# Altium PCB PCB2.PcbDoc
Units mm, origin at the board's own origin, x right, y up, seen from the top; angles counter-clockwise.
Board outline 120 x 60 mm, 2 copper layers (Top Layer, Bottom Layer); 14 components, 14 nets, 72 pads, 22 vias.
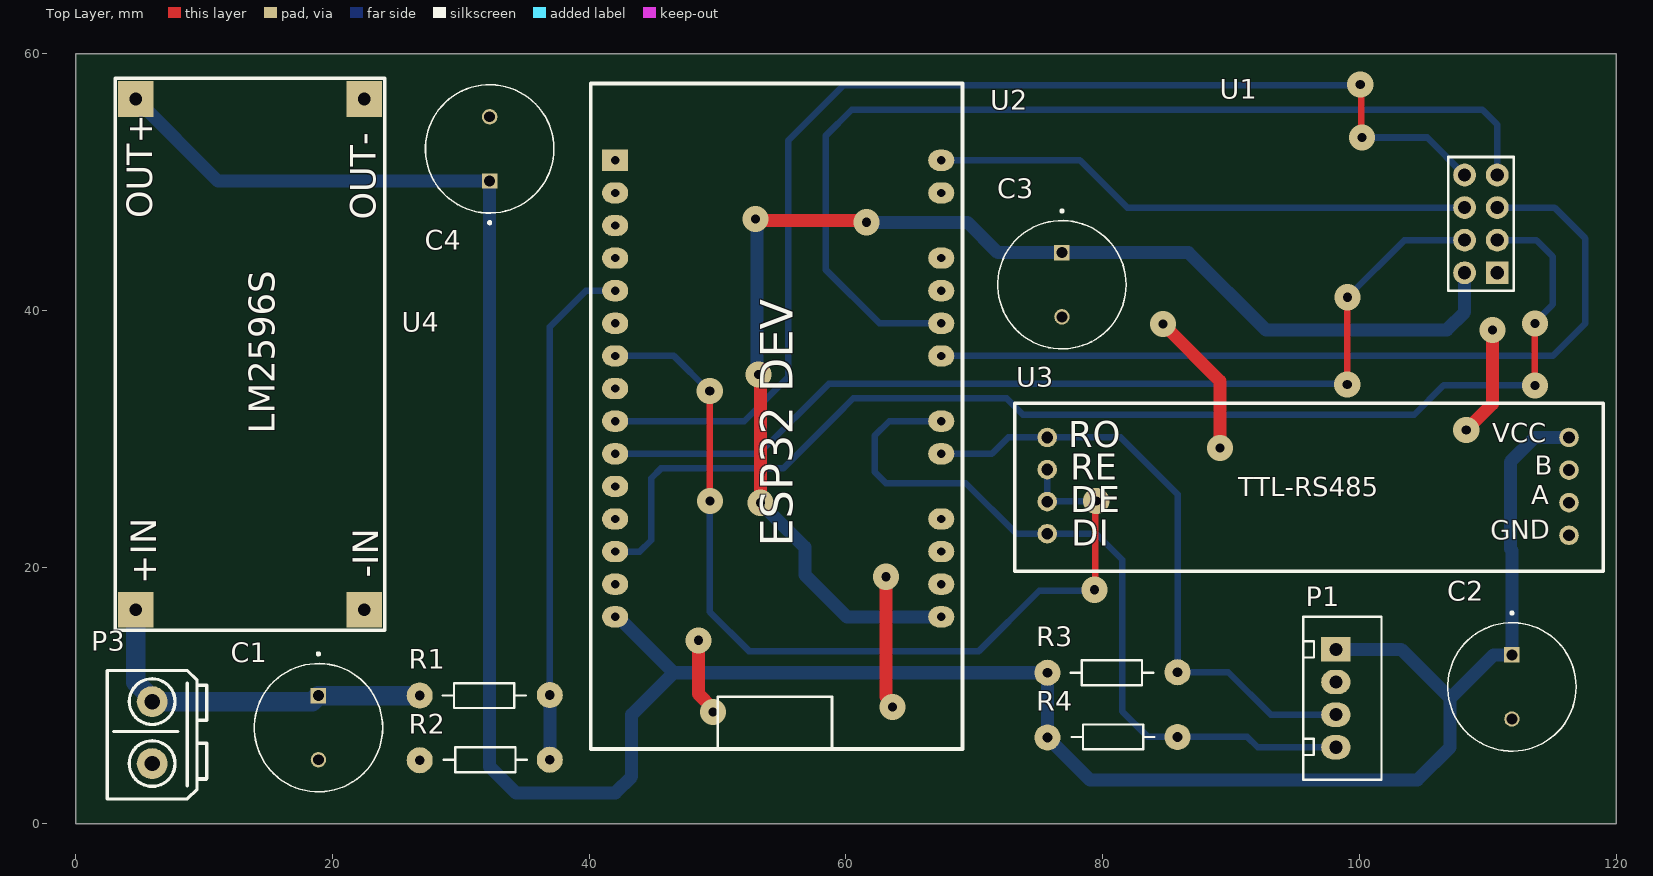
[diagram p0: Top Layer view]
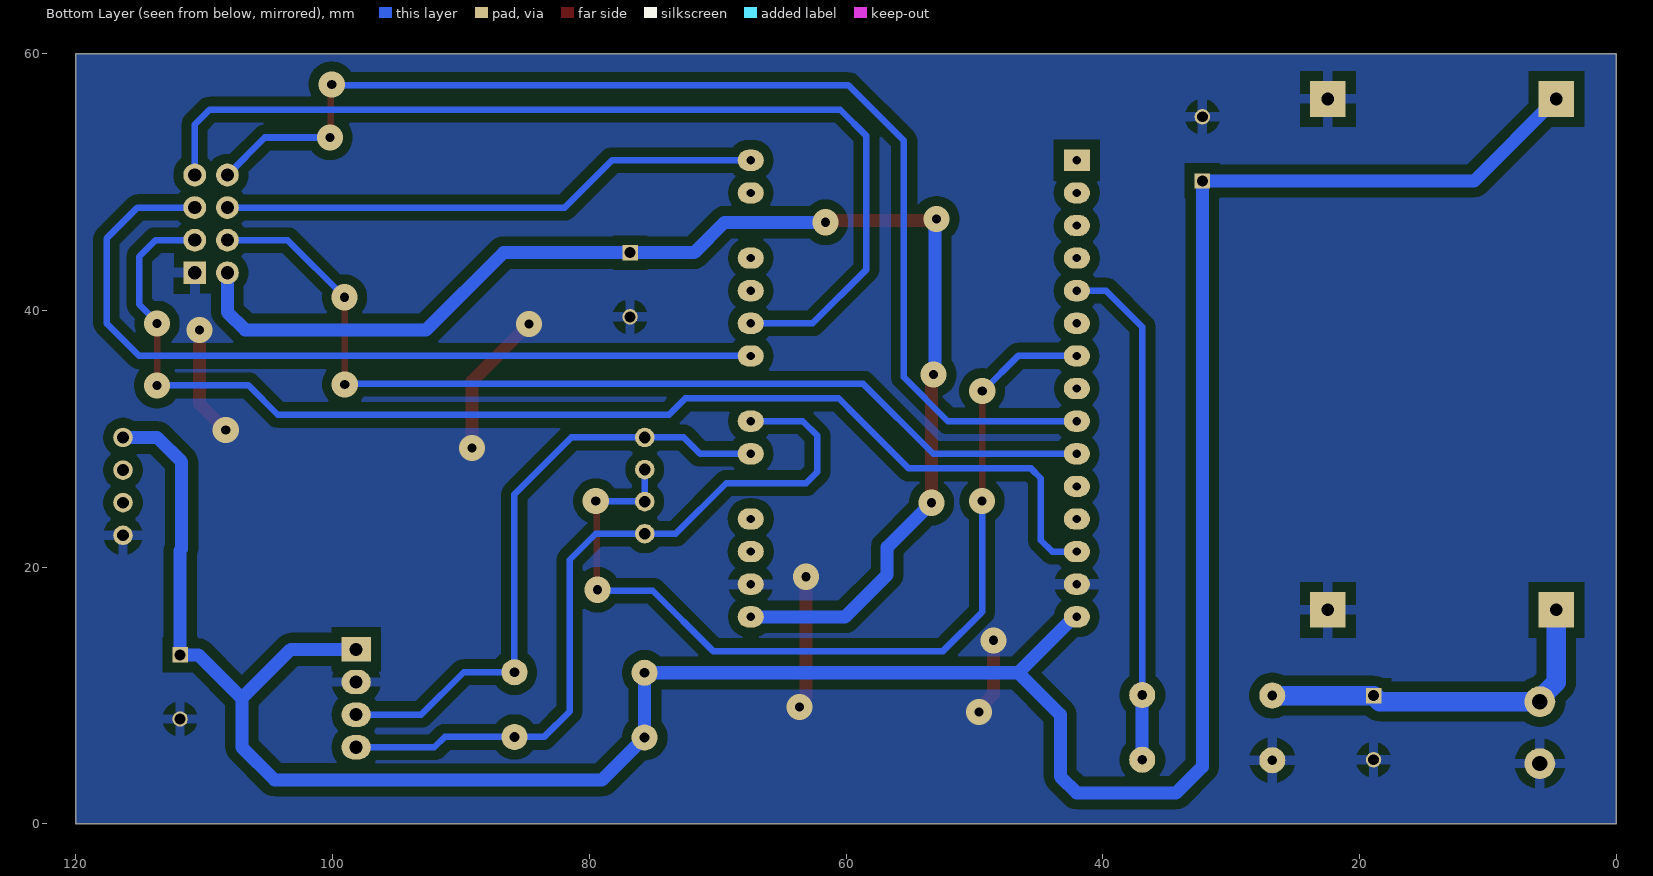
[diagram p1: Bottom Layer view, seen from below]

## Layer stack, top to bottom
Top Solder: solder mask 0.0102, Solder Resist, Dk 3.5
Top Layer: signal copper 0.0356
Dielectric 1: dielectric 0.32, FR-4, Dk 4.8
Bottom Layer: signal copper 0.0356
Bottom Solder: solder mask 0.0102, Solder Resist, Dk 3.5

## Board outline
0,0 0,60 120,60 120,0

## Design rules (kind name [scope] priority, off if disabled: settings)
Clearance [All] p1: gap=0.254 ignorepadtopadclearanceinfootprint=FALSE except(0: Arc-Hole Track-Hole SMDPad-Hole THPad-Hole Via-Hole Fill-Hole Poly-Hole Region-Hole Text-Hole; 0.762: Arc-Fill Arc-Poly Arc-Region Track-Fill Track-Poly Track-Region SMDPad-Fill SMDPad-Poly SMDPad-Region THPad-Fill THPad-Poly THPad-Region Via-Fill Via-Poly Via-Region Fill-Fill Fill-Poly Fill-Region Poly-Poly Poly-Region Region-Region)
PlaneClearance [All] p1: clearance=0.762
PlaneConnect [All] p1: planeconnectstyle=Relief reliefexpansion=0.762 reliefentries=4 reliefconductorwidth=0.762 reliefairgap=0.762
PolygonConnect [All] p1: connectstyle=Relief reliefconductorwidth=0.762 reliefentries=4 polygonreliefangle="90 Angle" airgapwidth=0.762
RoutingVias [All] p1: holewidth=0.711 width=1.27 viastyle="Through Hole" minholewidth=0.711 minwidth=1.27 maxholewidth=0.711 maxwidth=1.27
SolderMaskExpansion [All] p1: expansion=0.102 istentingtop=FALSE
Width [All] p1: maxlimit=1.524 minlimit=0.508 preferedwidth=1.016 minimp=50.000000 maximp=50.000000 favimp=50.000000
28 further rules are at their usual default settings.

## Classes and differential pairs
component class Schematic: C1 C2 C3 C4 P1 P3 R1 R2 U1 U2 U3 U4

## Components (designator, comment, footprint, x,y, rotation, side; value= is the part's Value field where it differs from the comment)
C1 "220uF/25V" CAP-ALUM-10x12.5 18.914,7.496 r270 top
C2 "220uF/25V" CAP-ALUM-10x12.5 111.878,10.671 r270 top
C3 "220uF/25V" CAP-ALUM-10x12.5 76.826,42 r270 top
C4 "220uF/25V" CAP-ALUM-10x12.5 32.249,52.581 r90 top
P1 "GPS" B4B-XH-A 98.162,13.592 r270 top value=B4B-XH-A
P3 "Domino 2" Domino-2 5.96,7.115 r0 top
R1 "100K" R1/4W-H1 31.868,10.015 r180 top
R2 "47K" R1/4W-H1 31.868,4.977 r0 top
R3 "100K" R1/4W-H1 80.763,11.793 r180 top (schematic designator R1)
R4 "47K" R1/4W-H1 80.763,6.755 r0 top (schematic designator R2)
U1 "Lora_SX1278" Module-LORA-SX1278 110.735,42.929 r90 top
U2 "ESP32_30P" Kit-ESP32-30P 55.49,28.578 r0 top
U3 "Uart_to_RS485_V1" Module-Uart-RS485-V1 96.003,26.292 r0 top
U4 "LM2596S" Module-LM2596S 13.58,36.579 r90 top

## Footprints (in the part's own frame and the unit in brackets; to place one, negate y for a bottom-side part, rotate by r counter-clockwise, add the part's x,y. Pads: shape width x height; smd on the part's side, far side on the other; paste and mask are expansions set on the pad)
B4B-XH-A [mil] "B4B-XH-A"
  rect 75x90 hole 40: 1(0,0)
  oval 75x90 hole 40: 2(100,0) 3(200,0) 4(300,0)
  silkscreen extent -100,-100 400,140, body extent -94,-93 394,133, height 271
CAP-ALUM-10x12.5 [mm] "Capacitor Aluminum 10mmx12.5mm"
  rect 1.2x1.2 hole 0.85: 1(-2.5,0)
  round 1.2 hole 0.85: 2(2.5,0)
  silkscreen extent -5.85,-5 5,5, body extent -5,-5 5,5, height 12.5
Domino-2 [mil] "Domino-2"
  round 94.5 hole 47.2 paste-99999 mask+2: 1(0,-95) 2(0,95)
  silkscreen extent -138,-203 168,190, body extent -197,-195 197,221, height 551
Kit-ESP32-30P [mil] "Kit ESP32 30P"
  rect 80x65 hole 25.2: 1(-530,910)
  oval 80x65 hole 25.2: 2(-530,810) 3(-530,710) 4(-530,610) 5(-530,510) 6(-530,410) 7(-530,310) 8(-530,210) 9(-530,110) 10(-530,10) 11(-530,-90) 12(-530,-190) 13(-530,-290) 14(-530,-390) 15(-530,-490) 16(470,-490) 17(470,-390) 18(470,-290) 19(470,-190) 21(470,10) 22(470,110) 24(470,310) 25(470,410) 26(470,510) 27(470,610) 29(470,810) 30(470,910)
  round 0 all layers, no hole: 20(-2184.66,-90) 23(-2184.66,210) 28(-2184.66,710)
  silkscreen extent -605,-895 535,1145, body extent -596,-880 526,1125, height 473
Module-LM2596S [mm] "Module LM2596S"
  rect 2.799x2.799 hole 1 paste-2539.97 mask+0.102: 1(-19.9,8.9) 2(-19.9,-8.9) 3(19.9,8.9) 4(19.9,-8.9)
  silkscreen extent -21.5,-10.5 21.5,10.5, body extent -21.6,-10.63 21.6,10.63, height 13.35
Module-LORA-SX1278 [mil] "Module Lora SX1278 RA-02 SPI"
  rect 70x70 hole 40.16: 1(0,0)
  round 70 hole 40.16: 2(100,0) 3(200,0) 4(300,0) 5(0,100) 6(100,100) 7(200,100) 8(300,100)
  silkscreen extent -55,-50 355,150, body extent -204,-50 504,861, height 497
Module-Uart-RS485-V1 [mil] "Module Uart to RS485 V1"
  round 60 hole 36 paste+0 mask+2: 1(-800,150) 2(-800,51.57) 3(-800,-46.85) 4(-800,-145.28) 5(800,-150) 6(800,-50) 7(800,50) 8(800,150)
  silkscreen extent -900,-260 905,255, body extent -866,-276 866,276, height 743
R1/4W-H1 [mil] "R 1/4W Horizontal, 2 Pin, 350mil"
  round 80 hole 30: 1(-199.5,-0.75) 2(199.5,0.75)
  silkscreen extent -126,-37 128,39, body extent -211,-51 211,51, height 106

## Part data
C1 C2 C3 C4: library part EEUTA1E221, "Capacitor Aluminum 220uF 20% 25V Radial", MPN=CLA4514, Category=CAPACITOR, MFR_URL=http://linhkienchatluong.vn/tu-hoa-chat-luong-cao/tu-hoa-63v-47uf-nipponlelon-8x11mm_sp977_ct6500.aspx, PinCount=2, Solder=WAVE
P1: library part B4B-XH-A, "Connector Header Through Hole 4 position 0.098\" (2.50mm)"
P3: library part Domino-2
R1 R2 R3 R4: library part RES-1/4W, "Resistor 1/4W Through Hole"
U1: library part Module-Lora-SX1278-SPI, "Module Lora SX1278 RA02 SPI"
U2: library part Kit_ESP32_30P, "Kit ESP32 30P"
U3: library part Module-Uart-to-RS485-V1, "Module Uart to RS485 V1"
U4: library part Module-LM2596S, "Module LM2596S"

## Via types
v1: diameter 2.032, hole 0.711, Top Layer to Bottom Layer, 22 vias

## Nets (pads, with @x,y where several pads share a name; then routed paths per layer and width w, separated by ;. In a path a pad name is that pad's centre, name@x,y a point inside that pad or via, vN(x,y) a via of type N, cw(c..) or ccw(c..) an arc to the next point about the centre after c; other vN are vias at no path point)
ADC: R1.1 R2.2 U2.5 | length 40
  Bottom Layer w0.508: R1.1 36.936,38.714 39.754,41.532 U2.5
  Bottom Layer w1.016: R2.2 R1.1
CT: U2.7 U3.2 U3.3 | length 72.4
  Top Layer w0.508: v1(49.394,33.732) 49.398,33.727 49.398,25.151 v1(49.403,25.146) ; v1(79.366,18.238) 79.434,18.306 79.434,25.078 v1(79.502,25.146)
  Bottom Layer w0.508: U2.7 46.606,36.452 v1@49.276,33.782 ; v1(49.403,25.146) 49.403,16.51 52.451,13.462 70.358,13.462 75.057,18.161 v1@79.756,18.161 ; U3.2 U3.3 75.705,25.124 79.48,25.124 v1(79.502,25.146)
DC3V3: C3.1 U1.5 U2.16 | length 103.5
  Top Layer w1.016: v1(52.959,47.117) 53.086,46.99 61.468,46.99 v1(61.595,46.863) ; v1(53.34,25.019) v1@53.34,34.798
  Bottom Layer w1.016: v1(52.959,47.117) 53.081,46.995 53.081,35.124 v1(53.204,35.002) ; v1(53.34,25.019) 56.801,21.558 56.801,19.399 60.068,16.132 U2.16 ; v1(61.595,46.863) 69.469,46.863 71.832,44.5 C3.1 86.691,44.5 92.71,38.481 106.807,38.481 108.195,39.869 U1.5
DC5V: C2.1 C4.1 P1.1 R3.2 R4.1 U2.15 U3.8 U4.3 | length 213
  Bottom Layer w1.016: U4.3 11.078,50.081 C4.1 32.249,4.454 34.29,2.413 42.037,2.413 43.307,3.683 43.307,8.504 46.577,11.774 ; U2.15 42.219,16.132 46.577,11.774 ; P1.1 103.248,13.592 107.061,9.779 ; U3.8 113.668,30.102 111.763,28.197 111.763,21.397 111.878,21.281 C2.1 110.453,13.171 107.061,9.779 ; 46.577,11.774 R3.2 R4.1 79.003,3.429 104.521,3.429 107.061,5.969 107.061,9.779
GND: C1.2 C2.2 C3.2 C4.2 P1.2 P3.1 R2.1 U1.1 U2.14 U2.17 U3.5 U4.2 U4.4 | length 36.6
  Top Layer w1.016: v1(48.505,14.301) 48.505,10.131 49.648,8.988 v1(49.648,8.713) ; v1(63.11,19.254) 63.11,9.877 63.618,9.369 v1(63.618,9.094) ; v1(84.7,38.939) 89.145,34.494 v1(89.145,29.287) ; v1(108.322,30.684) 110.363,32.725 v1(110.363,38.481)
LORA_DIO0: U1.8 U2.9 | length 93.1
  Top Layer w0.508: v1(100.067,57.608) 100.135,57.54 100.135,53.535 v1(100.203,53.467)
  Bottom Layer w0.508: U2.9 52.073,31.372 55.499,34.798 55.499,53.213 59.817,57.531 v1@100.076,57.531 ; v1(100.203,53.467) 105.277,53.467 U1.8
LORA_NSS: U1.6 U2.10 | length 76.9
  Top Layer w0.508: v1(99.051,34.24) 99.055,34.244 99.055,41.016 v1(99.06,41.021)
  Bottom Layer w0.508: U2.10 53.216,28.832 58.674,34.29 v1@98.933,34.29 ; v1(99.06,41.021) 103.508,45.469 U1.6
LORA_RST: U1.2 U2.13 | length 96.3
  Top Layer w0.508: v1(113.665,34.163) v1(113.665,38.989)
  Bottom Layer w0.508: U2.13 43.945,21.212 44.831,22.098 44.831,26.924 45.593,27.686 55.118,27.686 59.182,31.75 60.579,33.147 72.517,33.147 73.787,31.877 104.267,31.877 106.553,34.163 v1(113.665,34.163) ; U1.2 113.789,45.469 115.062,44.196 115.062,40.466 113.665,39.069 v1(113.665,38.989)
RX2: P1.3 R3.1 U2.21 U3.1 | length 48.3
  Bottom Layer w0.508: U2.21 71.377,28.832 72.647,30.102 U3.1 81.404,30.102 85.831,25.675 R3.1 89.788,11.812 93.088,8.512 P1.3
SPI_MISO: U1.4 U2.25 | length 78.7
  Bottom Layer w0.508: U2.25 62.608,38.992 58.42,43.18 58.42,53.594 60.452,55.626 109.584,55.626 110.735,54.474 U1.4
SPI_MOSI: U1.7 U2.30 | length 42.3
  Bottom Layer w0.508: U2.30 78.229,51.692 81.912,48.009 U1.7
SPI_SCK: U1.3 U2.24 | length 65.7
  Bottom Layer w0.508: U2.24 115.065,36.452 117.602,38.989 117.602,45.593 115.186,48.009 U1.3
TX2: P1.4 R4.2 U2.22 U3.4 | length 60.2
  Bottom Layer w0.508: U2.22 63.376,31.372 62.23,30.226 62.23,27.432 63.119,26.543 69.342,26.543 73.283,22.602 U3.4 79.506,22.602 81.534,20.574 81.534,8.763 83.523,6.774 91.27,6.774 92.072,5.972 P1.4
VCC: C1.1 P3.2 R1.2 U4.1 | length 28.7
  Bottom Layer w1.524: U4.1 4.68,11.045 5.96,9.765 P3.2 18.446,9.528 C1.1 R1.2
pads on no net: U2.1 U2.2 U2.3 U2.4 U2.6 U2.8 U2.11 U2.12 U2.18 U2.19 U2.20 U2.23 U2.26 U2.27 U2.28 U2.29 U3.6 U3.7

## Polygon pours and split planes (outlines as drawn)
GND on Bottom Layer "GND_L02_P000" (solid, pour order 0): 0,0 120.015,0 120.015,59.986 119.995,60.006 119.988,59.999 0.014,59.999

## Silkscreen, mask and mechanical layers (free items; w line width, h text height)
Mechanical 1:
  the board outline again, w0.5

## Text inside footprints (layer, text, board x,y; h text height)
U2: Top Overlay "ESP32 DEV" at 55.871,21.593 h2.54 r90
U3: Top Overlay "TTL-RS485" at 90.542,25.022 h2.54; Top Overlay "VCC" at 110.357,29.241 h2.54; Top Overlay "A" at 113.402,24.387 h2.54; Top Overlay "B" at 113.656,26.673 h2.54; Top Overlay "GND" at 110.227,21.621 h2.54 r1; Top Overlay "DI" at 77.538,21.669 h2.03; Top Overlay "DE" at 77.461,24.26 h2.03; Top Overlay "RE" at 77.461,26.8 h2.03; Top Overlay "RO" at 77.334,29.34 h2.03
U4: Top Overlay "OUT+" at 5.97,47.179 h2 r90; Top Overlay "OUT-" at 23.372,47.078 h2 r90; Top Overlay "+IN" at 6.27,18.679 h2 r90; Top Overlay "-IN" at 23.57,19.179 h2 r90